# Altium PCB CONN_BOTT.PcbDoc
Units mm, origin at the board's own origin, x right, y up, seen from the top; angles counter-clockwise.
Board outline 12.5 x 23 mm, 4 copper layers (Top Layer, TOP_RTN, BOTT_RTN, Bottom Layer), stack 0.568 mm thick; 8 components, 22 nets, 64 pads, 36 vias.
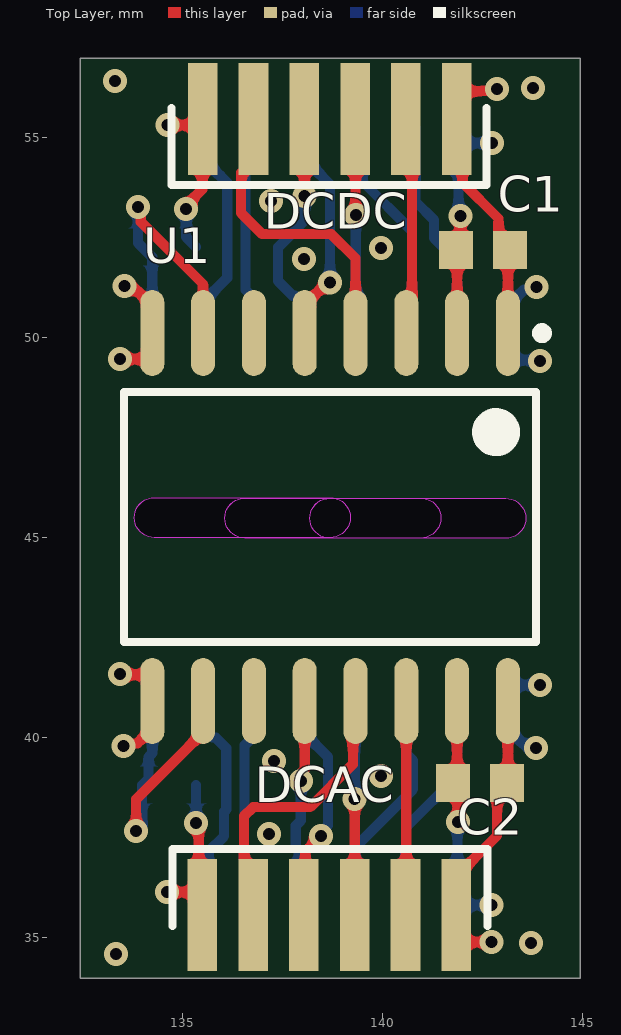
[diagram p0: Top Layer view]
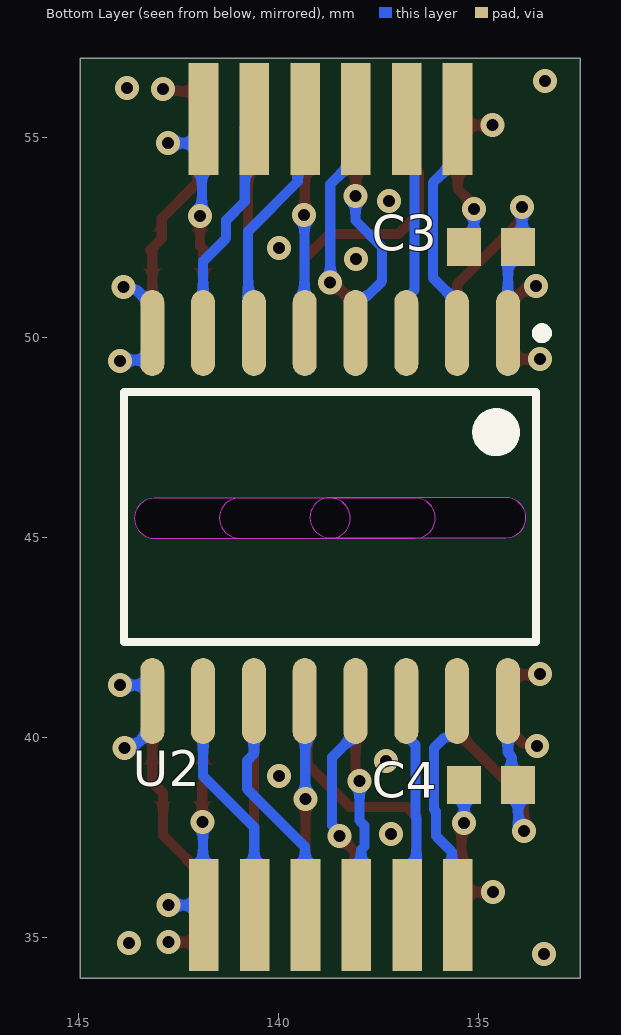
[diagram p1: Bottom Layer view, seen from below]
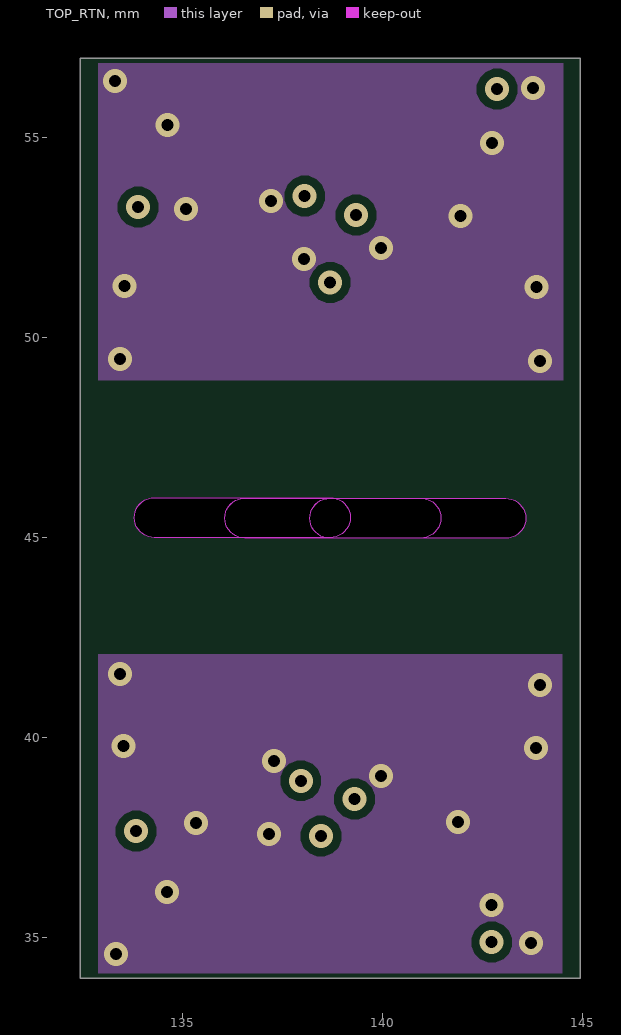
[diagram p2: TOP_RTN]
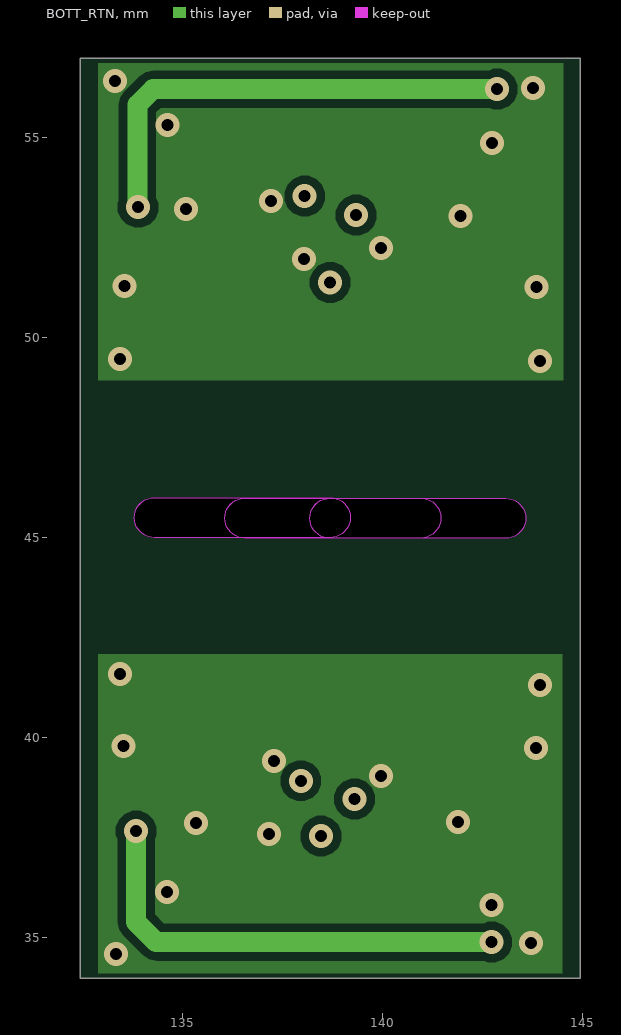
[diagram p3: BOTT_RTN]

## Layer stack, top to bottom
Top Solder: solder mask 0.0102, Solder Resist, Dk 3.5
Top Layer: signal copper 0.0356
Dielectric 2: prepreg 0.0711, PP-006, Dk 4.1
TOP_RTN: signal copper 0.0175
Dielectric 1: dielectric 0.32, FR-4, Dk 4.8
BOTT_RTN: signal copper 0.0175
Dielectric 3: prepreg 0.0711, PP-006, Dk 4.1
Bottom Layer: signal copper 0.0356
Bottom Solder: solder mask 0.0102, Solder Resist, Dk 3.5

## Board outline
132.45,33.975 132.45,56.975 144.95,56.975 144.95,33.975
cut-out: 140.967,45.976 cw(c140.967,45.476) 141.467,45.476 cw(c140.967,45.476) 140.967,44.976 136.567,44.976 cw(c136.567,45.476) 136.067,45.476 cw(c136.567,45.476) 136.267,45.876 136.167,45.776 cw(c136.567,45.476) 136.567,45.976
cut-out: 138.704,45.987 cw(c138.704,45.488) 139.204,45.487 cw(c138.704,45.487) 138.704,44.987 134.304,44.987 cw(c134.304,45.487) 133.804,45.487 cw(c134.304,45.487) 134.004,45.888 133.904,45.787 cw(c134.304,45.488) 134.304,45.987
cut-out: 143.092,45.971 cw(c143.092,45.471) 143.592,45.471 cw(c143.092,45.471) 143.092,44.971 138.692,44.971 cw(c138.692,45.471) 138.192,45.471 cw(c138.692,45.471) 138.392,45.871 138.292,45.771 cw(c138.692,45.471) 138.692,45.971

## Design rules (kind name [scope] priority, off if disabled: settings)
Clearance [All] p1: gap=0.203 ignorepadtopadclearanceinfootprint=FALSE
PlaneConnect [All] p1: planeconnectstyle=Direct reliefexpansion=0.508 reliefentries=4 reliefconductorwidth=0.254 reliefairgap=0.254
PolygonConnect [All] p1: connectstyle=Direct reliefconductorwidth=0.254 reliefentries=4 polygonreliefangle="90 Angle" airgapwidth=0.254
RoutingVias [All] p1: holewidth=0.711 width=1.27 viastyle="Through Hole" minholewidth=0.711 minwidth=1.27 maxholewidth=0.711 maxwidth=1.27
SolderMaskExpansion [All] p1: expansion=0.102 istentingtop=FALSE
Width [All] p1: maxlimit=2 minlimit=0.254 preferedwidth=0.254
29 further rules are at their usual default settings.

## Components (designator, comment, footprint, x,y, rotation, side; value= is the part's Value field where it differs from the comment)
C1 "100nF" SAMS-C0603-2_N 142.525,52.175 r180 top
C2 "100nF" SAMS-C0603-2_N 142.45,38.85 r180 top
C3 "100nF" SAMS-C0603-2_N 134.675,52.25 r0 bottom
C4 "100nF" SAMS-C0603-2_N 134.675,38.8 r0 bottom
DCAC "Header 6X2" "EDGE GOLDPIN 12P 1.27mm" 135.505,36.075 r0 top
DCDC "Header 6X2" "EDGE GOLDPIN 12P 1.27mm" 141.865,54.925 r180 top
U1 "Si8631BD-B-IS" SLAB-SOIC-16-WB_N 138.7,45.5 r270 top
U2 "Si8663BD-B-IS" SLAB-SOIC-16-WB_N 138.7,45.5 r270 bottom

## Footprints (in the part's own frame and the unit in brackets; to place one, negate y for a bottom-side part, rotate by r counter-clockwise, add the part's x,y. Pads: shape width x height; smd on the part's side, far side on the other; paste and mask are expansions set on the pad)
"EDGE GOLDPIN 12P 1.27mm" [mm]
  rect 0.74x2.8 smd: 1(0,-0.525) 3(1.27,-0.525) 5(2.54,-0.525) 7(3.81,-0.525) 9(5.08,-0.525) 11(6.35,-0.525)
  rect 0.74x2.8 smd far side: 2(0,-0.525) 4(1.27,-0.525) 6(2.54,-0.525) 8(3.81,-0.525) 10(5.08,-0.525) 12(6.35,-0.525)
  silkscreen extent -0.75,-0.8 7.12,1.12
SAMS-C0603-2_N [mm] "Chip Capacitor, 2-Leads, Body 1.70x0.90mm, IPC Medium Density"
  rect 0.85x0.95 smd: 1(-0.675,0) 2(0.675,0)
  body extent -0.85,-0.45 0.85,0.45, height 0.9
SLAB-SOIC-16-WB_N [mm] "SOIC, 16-Leads, Body 10.3x7.5mm, Pitch 1.27mm, IPC Medium Density"
  oval 2.15x0.6 smd: 1(-4.6,4.445) 2(-4.6,3.175) 3(-4.6,1.905) 4(-4.6,0.635) 5(-4.6,-0.635) 6(-4.6,-1.905) 7(-4.6,-3.175) 8(-4.6,-4.445) 9(4.6,-4.445) 10(4.6,-3.175) 11(4.6,-1.905) 12(4.6,-0.635) 13(4.6,0.635) 14(4.6,1.905) 15(4.6,3.175) 16(4.6,4.445)
  silkscreen extent -4.72,-5.15 3.13,5.42, body extent -3.75,-5.15 3.75,5.15, height 2.65

## Part data
C1 C2 C3 C4: library part CMP-2000-05332-1, "Cap Ceramic 0.1uF 50VDC X7R 10% SMD 0603 Paper T/R", Capacitance=0.1µF, Case Code (Imperial)=0603, Case Code (Metric)=1608, Dielectric=X7R, Manufacturer="Samsung Electro-Mechanics", Manufacturer Part Number=CL10B104KB8NNNC, Max Operating Temperature=125°C, Min Operating Temperature=-55°C, Package Quantity=1, Rated Voltage=50V, Supplier Part Number 1=1276-1000-1-ND, Tolerance=10%, Tolerance (%)=±10%, Case Size/Dimension=0603, Case/Package=0603, Category="Ceramic Capacitors", ComponentLink1Description=https://datasheet.ciiva.com/25803/cl10b104kb8nnnc-25803393.pdf?src-supplier=Digi-Key, ComponentLink1URL=https://datasheet.ciiva.com/25803/cl10b104kb8nnnc-25803393.pdf?src-supplier=Digi-Key, ComponentLink2Description=https://datasheet.ciiva.com/26838/getdatasheetpartid-89097-26838411.pdf?src-supplier=Verical, ComponentLink2URL=https://datasheet.ciiva.com/26838/getdatasheetpartid-89097-26838411.pdf?src-supplier=Verical, ComponentLink3Description=https://datasheet.ciiva.com/29198/456651-da-01-en-vs-kondensator-0605-29198839.pdf?src-supplier=Conrad, ComponentLink3URL=https://datasheet.ciiva.com/29198/456651-da-01-en-vs-kondensator-0605-29198839.pdf?src-supplier=Conrad, Construction=Flat, Contact Plating=Tin, Datasheet URL=https://datasheet.ciiva.com/29198/456651-da-01-en-vs-kondensator-0605-29198839.pdf, Datasheet Version=Nov-10, Depth=0.8mm, Height=0.8mm, Lead Free="Lead Free", Length=1.6mm, Manufacturer URL=http://www.samsungsem.com/global/index.jsp, Material=Ceramic, Mount="Surface Mount", Packaging="Tape and Reel", Pricing 1="1=0.10000, 10=0.03000, 50=0.01620, 100=0.01330, 500=0.00950, 1000=0.00746 (USD)", Radiation Hardening=No, RoHS=Yes, RoHS Compliant=Yes, Series=CL, Stock 1=13409690, Supplier 1=Digi-Key, Thickness=0.035inch, Voltage=50V, Voltage Rating=50V, Voltage Rating (DC)=50V, Width=0.031inch
DCAC DCDC: "Header, 6-Pin, Dual row", LatestRevisionDate=17-Jul-2002, LatestRevisionNote="Re-released for DXP Platform.", Publisher="Altium Limited"
U1: library part CMP-0512-00313-1, "Low-Power Triple-Channel Digital Isolator, 150 Mbps, 5 kVRMS Isolation Rating, -40 to 125 degC, 16-pin SOIC", Isolation Rating (kV)=5, Manufacturer="Silicon Labs", 10kV surge=FALSE, AEC-Q100=TRUE, Channel Type=Unidirectional, Code_JEDEC=MS-013, ComponentLink1Description="Manufacturer URL", ComponentLink1URL=http://www.silabs.com/, ComponentLink2Description=Datasheet, ComponentLink2URL=http://www.silabs.com/Support%20Documents/TechnicalDocs/Si863x.pdf, ComponentLink3Description="Package Specification", ComponentLink3URL=https://www.silabs.com/Support%20Documents/TechnicalDocs/Si823x.pdf, DatasheetVersion="Rev. 1.3", Enable Control=TRUE, Maximum Data Rate (Mbps)=150, Maximum Propagation Delay (ns)=13, Mounting Technology="Surface Mount", PackageDescription="16-Pin Wide Body Plastic Small Outline, Body 10.3 x 7.5 mm, Pitch 1.27 mm", PackageReference=SOIC-16-WB, PartNumber=Si8631BD-B-IS, Sub-Family=Isolators
U2: library part CMP-0512-00250-1, "Low Power Six-Channel Digital Isolator, 150 Mbps, 5 kVRMS Isolation Rating, -40 to 125 degC, 16-pin SOIC", Isolation Rating (kV)=5, Manufacturer="Silicon Labs", 10kV surge=FALSE, AEC-Q100=FALSE, Channel Type=Unidirectional, Code_JEDEC=MS-013, ComponentLink1Description="Manufacturer URL", ComponentLink1URL=http://www.silabs.com/, ComponentLink2Description=Datasheet, ComponentLink2URL=http://www.silabs.com/Support%20Documents/TechnicalDocs/Si866x.pdf, ComponentLink3Description="Package Specification", ComponentLink3URL=https://www.silabs.com/Support%20Documents/TechnicalDocs/Si823x.pdf, DatasheetVersion="Rev. 1.4", Enable Control=FALSE, Maximum Data Rate (Mbps)=150, Maximum Propagation Delay (ns)=13, Mounting Technology="Surface Mount", PackageDescription="16-Pin Wide Body Plastic Small Outline, Body 10.3 x 7.5 mm, Pitch 1.27 mm", PackageReference=SOIC-16-WB, PartNumber=Si8663BD-B-IS, Sub-Family=Isolators

## Via types
v1: diameter 0.6, hole 0.3, Top Layer to Bottom Layer, tented both sides, 36 vias

## Nets (pads, with @x,y where several pads share a name; then routed paths per layer and width w, separated by ;. In a path a pad name is that pad's centre, name@x,y a point inside that pad or via, vN(x,y) a via of type N, cw(c..) or ccw(c..) an arc to the next point about the centre after c; other vN are vias at no path point)
BOTT_GND: C2.2 C4.2 DCAC.1 DCAC.12 U1.9 U1.15 U2.9 | length 17.1
  Top Layer w0.254: v1(133.452,41.575) 133.465,41.562 134.095,41.562 134.255,41.402 134.255,40.219 133.879,39.843 133.598,39.843 v1(133.531,39.776) ; v1(134.625,36.125) 135.272,36.125 135.416,36.269 DCAC.1@135.416,36.629 ; v1(135.35,37.85) 135.416,37.784 DCAC.1@135.416,36.629 ; C2.2 C2.2@141.865,38.94 ; U1.15 141.875,38.95 C2.2@141.865,38.94 ; v1(141.896,37.879) 141.896,38.819 141.865,38.85 C2.2@141.865,38.94 ; DCAC.1@135.416,35.781 DCAC.1@135.416,36.629 ; DCAC.1@135.416,35.781 135.416,35.599 135.515,35.5 135.515,35.682 DCAC.1@135.416,35.781
  Bottom Layer w0.254: v1(135.35,37.85) C4.2 ; DCAC.12@141.865,35.5 DCAC.12@141.865,35.607 ; v1(141.896,37.879) 141.88,37.864 141.88,35.622 DCAC.12@141.865,35.607 ; v1(142.738,35.8) 142.058,35.8 DCAC.12@141.865,35.607 ; v1(143.846,39.732) 143.779,39.798 143.565,39.798 143.145,40.219 U2.9 143.145,41.14 143.305,41.3 v1(143.948,41.3)
  other v1: 133.35,34.575 143.725,34.85 137.175,37.575 139.975,39.025 137.3,39.4
DRV_BOTT_HF_MOS: DCAC.3 U1.13 | length 7.4
  Top Layer w0.254: DCAC.3 136.55,35.775 136.55,37.309 136.545,37.314 136.545,38.02 136.775,38.25 138.2,38.25 139.269,39.319 139.269,40.834 U1.13
DRV_BOTT_HF_MOS_DC: DCDC.9 U1.4 | length 7.7
  Top Layer w0.254: DCDC.9 136.785,54.42 136.475,54.11 136.475,53.1 137,52.575 137.784,52.575 137.789,52.58 138.311,52.58 138.316,52.575 138.73,52.575 139.335,51.97 U1.4
DRV_BOTT_LF_MOS: DCAC.2 U2.15 | length 5.9
  Bottom Layer w0.254: DCAC.2@135.515,35.5 135.657,35.642 135.657,37.132 136.05,37.525 136.05,38.133 136.105,38.188 136.105,39.726 135.843,39.988 135.756,39.988 135.525,40.219 U2.15
DRV_BOTT_LF_MOS_DC: DCDC.12 U2.2 | length 5.9
  Bottom Layer w0.254: DCDC.12@135.51,55.5 135.51,54.47 135.753,54.227 135.761,54.227 136.13,53.858 136.13,51.48 135.525,50.875 U2.2
GND: C1.2 C3.2 DCDC.2 DCDC.11 U1.2 U1.8 U2.8 | length 16.8
  Top Layer w0.254: v1(133.45,49.45) 134.095,49.45 134.255,49.61 U1.8 134.255,50.781 133.83,51.206 133.623,51.206 v1(133.557,51.272) ; v1(134.637,55.3) 135.31,55.3 135.51,55.5 135.505,55.495 135.505,53.699 135.1,53.294 v1(135.1,53.2) ; U1.2 141.875,52.15 C1.2 141.954,52.279 v1(141.954,53.029)
  Bottom Layer w0.254: v1(135.1,53.2) 135.1,52.5 C3.2 ; DCDC.2@141.86,55.5 141.907,55.453 DCDC.2@141.907,55.046 ; v1(141.954,53.029) 141.907,53.077 DCDC.2@141.907,55.046 ; v1(142.75,54.85) 142.103,54.85 DCDC.2@141.907,55.046 ; v1(143.864,51.257) 143.797,51.191 143.554,51.191 143.145,50.781 143.145,49.586 143.305,49.426 143.922,49.426 v1(143.948,49.4)
  other v1: 138.05,51.95 139.975,52.225 137.225,53.4 143.775,56.225 133.325,56.4
LF_TOP_TRIG_ADC: DCAC.4 U2.14 | length 5.6
  Bottom Layer w0.254: DCAC.4 136.543,35.782 136.543,37.979 136.562,37.999 136.562,39.799 136.795,40.031 U2.14
LF_TOP_TRIG_ADC_DC: DCDC.10 U2.3 | length 5.5
  Bottom Layer w0.254: DCDC.10 136.587,55.252 136.587,51.176 136.795,50.969 U2.3
OC_IN: DCAC.5 U2.13 | length 5.9
  Top Layer w0.254: DCAC.5@138.055,35.5 138.079,35.524 138.079,37.132 v1(138.471,37.525)
  Bottom Layer w0.254: U2.13 138.065,40.08 138.65,39.495 138.65,37.797 138.471,37.619 v1(138.471,37.525)
OC_IN_DC: DCDC.7 U2.4 | length 6
  Top Layer w0.254: DCDC.7@138.05,55.5 138.06,55.49 138.06,53.53 v1(138.065,53.525)
  Bottom Layer w0.254: U2.4 138.065,50.781 137.814,51.033 137.767,51.033 137.4,51.4 137.4,52.25 138.065,52.915 v1(138.065,53.525)
OC_OUT: DCAC.7 U2.12 | length 5.4
  Top Layer w0.254: v1(139.31,38.452) 139.318,38.444 139.318,35.507 DCAC.7@139.325,35.5
  Bottom Layer w0.254: v1(139.31,38.452) 139.323,38.464 139.323,40.888 U2.12
OC_OUT_DC: DCDC.5 U2.5 | length 5.4
  Top Layer w0.254: DCDC.5@139.32,55.5 139.335,55.485 139.335,53.065 v1(139.35,53.05)
  Bottom Layer w0.254: U2.5 139.343,50.108 139.343,53.042 v1(139.35,53.05)
OV_OUT: DCAC.6 U1.12 | length 5.6
  Top Layer w0.254: v1(137.967,38.908) 137.94,38.935 137.94,39.068 138.065,39.193 U1.12
  Bottom Layer w0.254: v1(137.967,38.908) 137.967,37.912 137.841,37.786 137.841,37.264 137.923,37.182 137.923,35.632 DCAC.6@138.055,35.5
OV_OUT_DC: DCDC.8 U1.5 | length 6
  Top Layer w0.254: U1.5 138.065,50.803 138.628,51.367 v1(138.7,51.367)
  Bottom Layer w0.254: DCDC.8@138.05,55.5 138.05,54.47 138.695,53.825 v1@138.695,51.372
SPI_MISO_DCAC: DCAC.9 U1.14 | length 5.4
  Top Layer w0.254: DCAC.9 140.605,35.57 140.605,38.745 ; 140.605,38.745 140.605,39.286 U1.14
SPI_MISO_DCAC_DC: DCDC.3 U1.3 | length 5.5
  Top Layer w0.254: DCDC.3 140.75,55.295 140.75,51.114 140.605,50.969 U1.3
SPI_MOSI_DCAC: DCAC.8 U2.11 | length 6.1
  Bottom Layer w0.254: DCAC.8@139.325,35.5 139.325,37.25 140.775,38.7 140.775,39.413 140.605,39.583 U2.11
SPI_MOSI_DCAC_DC: DCDC.6 U2.6 | length 6.1
  Bottom Layer w0.254: DCDC.6@139.32,55.5 139.51,55.31 139.51,53.89 140.75,52.65 140.75,51.114 140.605,50.969 U2.6
SPI_SCK_DCAC: DCAC.10 U2.10 | length 5.9
  Bottom Layer w0.254: DCAC.10@140.595,35.5 140.595,37.745 141.875,39.025 U2.10
SPI_SCK_DCAC_DC: DCDC.4 U2.7 | length 5.9
  Bottom Layer w0.254: DCDC.4@140.59,55.5 140.833,55.257 140.833,53.392 141.3,52.925 141.3,52.475 141.875,51.9 U2.7
V_3V3D: C2.1 C4.1 DCAC.11 U1.10 U1.16 U2.16 | length 26
  Top Layer w0.254: v1(133.85,37.65) 133.85,38.45 135.525,40.125 U1.10 ; v1(142.738,34.875) 142.108,34.875 141.865,35.118 141.865,36.53 142.875,37.54 142.875,38.6 143.145,38.87 143.145,38.95 U1.16
  BOTT_RTN w0.5: v1(133.85,37.65) 133.85,35.375 134.35,34.875 v1(142.738,34.875)
  Bottom Layer w0.254: v1(133.85,37.65) 133.85,37.744 134,37.894 C4.1 134.162,38.962 134.162,39.507 134.255,39.601 U2.16
V_3V3D_DC: C1.1 C3.1 DCDC.1 U1.1 U1.7 U2.1 | length 26.3
  Top Layer w0.254: v1(133.9,53.25) 133.966,53.184 133.966,52.884 135.522,51.328 135.522,50.103 U1.7 ; v1(142.875,56.2) 142.827,56.152 142.468,56.152 142.462,56.146 142.103,56.146 141.86,55.903 141.86,55.5 142.007,55.353 142.007,53.868 142.91,52.965 142.91,52.465 C1.1 143.145,52.12 U1.1
  BOTT_RTN w0.5: v1(133.9,53.25) 133.884,53.266 133.884,55.812 134.272,56.2 v1@142.848,56.2
  Bottom Layer w0.254: v1(133.9,53.25) 133.9,52.35 134.255,51.995 U2.1
pads on no net: U1.6 U1.11

## Polygon pours and split planes (outlines as drawn)
GND on TOP_RTN "NONET_L-01_P-001" (solid, remove dead copper, pour order 1): 132.9,48.925 132.9,56.85 144.525,56.85 144.525,48.925
BOTT_GND on TOP_RTN "NONET_L-01_P-001" (solid, remove dead copper, pour order 0): 132.9,34.1 132.9,42.075 144.5,42.075 144.5,34.1
GND on BOTT_RTN "NONET_L-01_P-001" (solid, remove dead copper, pour order 4): 132.9,48.925 132.9,56.85 144.525,56.85 144.525,48.925
BOTT_GND on BOTT_RTN "NONET_L-01_P-001" (solid, remove dead copper, pour order 2): 132.9,34.1 132.9,42.075 144.5,42.075 144.5,34.1

## Silkscreen, mask and mechanical layers (free items; w line width, h text height)
Mechanical 1:
  lines w0.2: 134.279,45.012 136.504,45.012 ; 134.279,46.012 142.866,46.012 ; 134.326,45.014 cw(c134.326,45.514) 133.826,45.514 cw(c134.326,45.514) 134.326,46.014 ; 136.404,45.012 138.629,45.012 ; 136.604,45.012 143.132,45.012 ; 142.832,46.012 143.032,46.012 cw(c143.032,45.512) 143.532,45.512 143.532,45.462 cw(c143.082,45.462) 143.082,45.012 ; 132.45,33.975 144.95,33.975 144.95,56.975 132.45,56.975 132.45,33.975